# Allegro board RotariuMB.brd
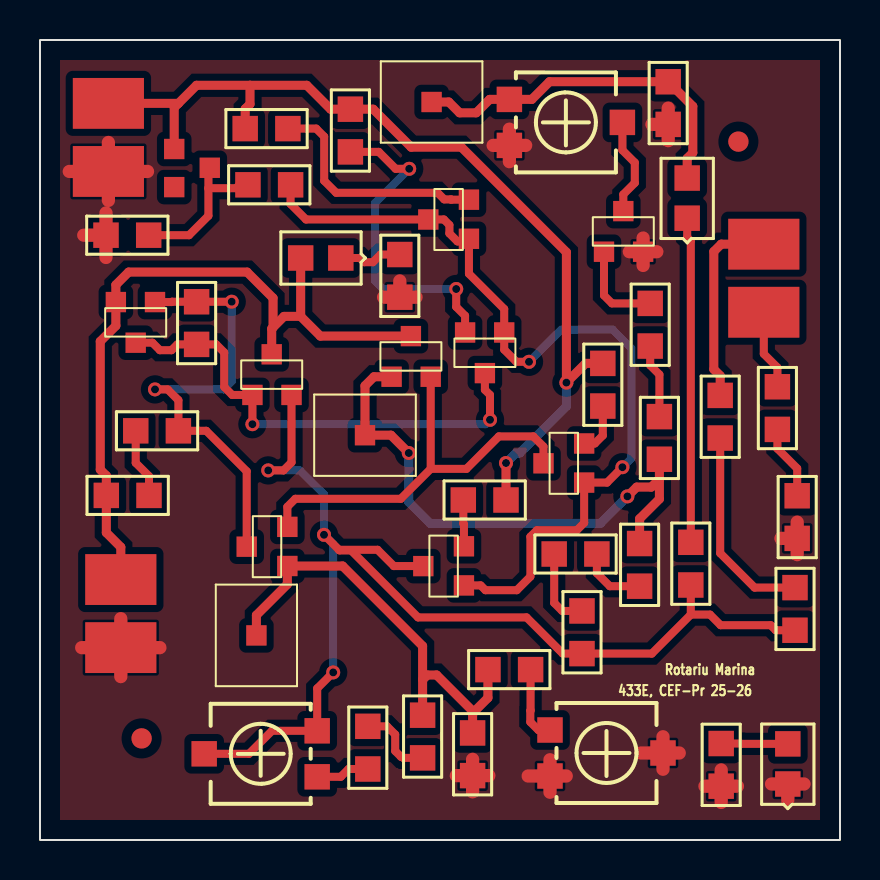
[diagram p0: board, top side]
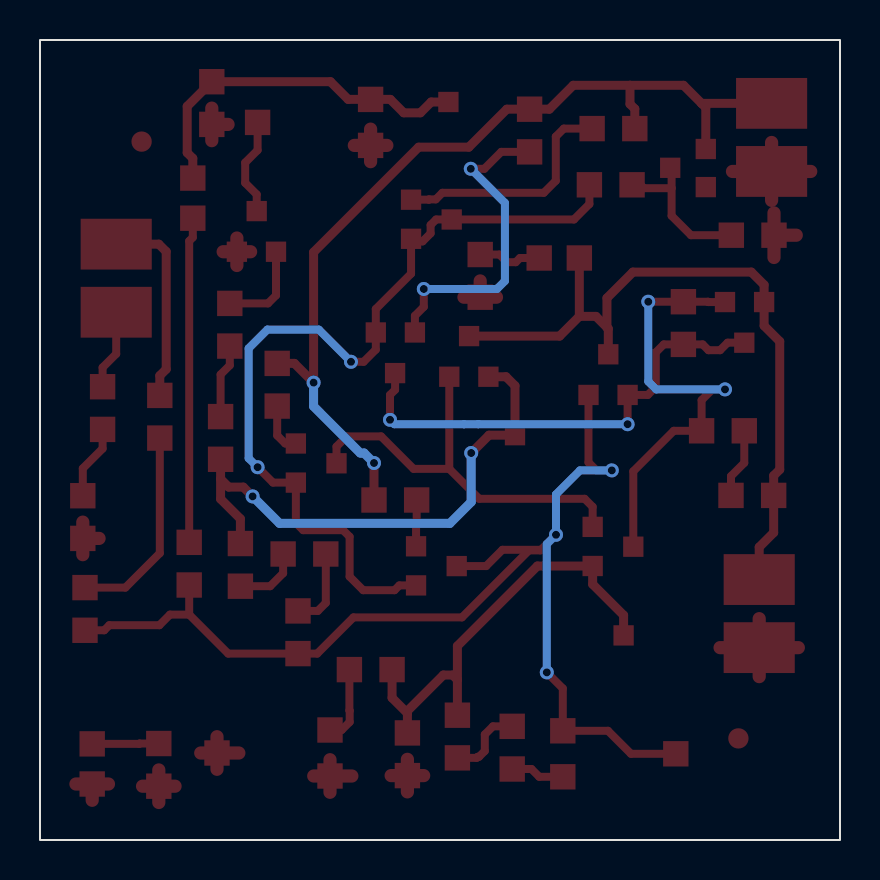
[diagram p1: board, bottom side, seen from below]

Outline 40 x 40 mm; copper layers: TOP, BOTTOM. Coordinates in mm from the lower left corner of the outline.
Outline path: rectangle 0,0 40,40

## Design rules (mm)
nets with their own width: min track width 0.4; nets N311744 N311796 N311844 N311952 N311958 N312148 N312154 N312204 N312252 N312298 N312310 N312450 N312534 N312554 N312656 N312740 N312860 N312866 N312872 N313104 N313292 N313298 N313314 N321792 N3130741
nets with their own width: min track width 0.45; nets V+ V- VCC VEE VGS VOUT
nets with their own width: min track width 0.66; nets 0

## Placement (name value [footprint] x y rotation side)
C1  4.7n  [SMC0805]  21.63 3.22 90 top
C2  4.7n  [SMC0805]  19.13 6.24 270 top
C3  100p  [SMC0805]  7.83 24.78 90 top
C4  33n  [SMC0805]  31.41 35.78 90 top
D1  BZX84-C2V7  [SOT23]  7.6 33.61 0 top
D3  D1N4148  [SMD0805]  32.36 31.09 90 top
D4  5V,LED,LED  [SMD0805]  15.04 29.1 180 top
D5  5V,LED,LED  [SMD0805]  37.39 2.8 90 top
JVCC  CON2  [JUMPER_SMD1X2]  4.04 11.32 270 top
JVEE  CON2  [JUMPER_SMD1X2]  3.42 35.13 90 top
JVGS  CON1  [JUMPER_SMD1X1]  19.58 36.9 0 top
JVOUT  CON2  [JUMPER_SMD1X2]  36.19 28.09 270 top
NOREF  -  [unnamed]  5.08 5.08 0 top
NOREF#2  -  [unnamed]  34.92 34.92 0 top
NOREF#3  -  [#2]  0 40 0 top
NOREF#4  -  [#2]  0 0 90 top
P1  5k  [TS53YL]  25.5 3.2 180 top
P2  5k  [TS53YL]  13.86 5.46 0 top
P3  500k  [TS53YL]  23.47 34.73 180 top
Q1  QBC817-25  [TO236]  12.24 13.7 0 top
Q2  QBC817-25  [TO236]  17.58 23.29 270 top
Q3  QBC817-25  [TO236]  27.08 17.87 0 top
Q4  QBC817-25  [TO236]  23.21 25.25 90 top
Q5  QBC817-25  [TO236]  21.32 30.06 0 top
Q6  QBC817-25  [TO236]  21.07 12.73 0 top
Q7  QBC807-25  [TO236]  5.75 26.77 90 top
Q8  QBC817-25  [TO236]  10.62 22.38 270 top
R1  330  [SMR0805]  24.53 8.52 180 top
R2  330  [SMR0805]  16.39 3.55 90 top
R3  330  [SMR0805]  5.45 17.23 180 top
R4  220  [SMR0805]  6.92 20.46 180 top
R5  1k  [SMR0805]  3.3 30.24 0 top
R6  1k  [SMR0805]  12.53 32.76 180 top
R7  100  [SMR0805]  10.26 35.57 0 top
R8  51  [SMR0805]  28.14 23.83 270 top
R9  51  [SMR0805]  15.52 36.54 270 top
R10  68  [SMR0805]  23.3 17 180 top
R11  3.3k  [SMR0805]  30.51 26.83 270 top
R13  6.8k  [SMR0805]  29.98 12.69 90 top
R14  3.9k  [SMR0805]  25.71 14.3 0 top
R15  910  [SMR0805]  27.1 9.32 90 top
R17  1k  [SMR0805]  32.54 12.75 90 top
R18  68k  [SMR0805]  37.75 12.62 270 top
R19  68k  [SMR0805]  34.01 22.23 270 top
R22  470  [SMR0805]  34.06 2.69 90 top
R23  470  [SMR0805]  17.99 27.14 90 top
R24  2.2k  [SMR0805]  30.97 21.17 270 top
RL1  10k  [SMR0805]  36.87 20.53 90 top
RL2  15k  [SMR0805]  37.86 15.08 90 top
T9  JMMBFJ309LT1  [TO236]  28.2 29.54 270 top
V+  CON1  [JUMPER_SMD1X1]  10.82 10.23 90 top
V-  CON1  [JUMPER_SMD1X1]  16.25 20.24 0 top

## Library data of the parts
C1-C4 = C
D1 = BZX84-C2V7_0
D3 = D1N4148_4
D4 = LED_8
D5 = LED_9
JVCC JVEE JVOUT = CON2
JVGS V+ V- = CON1
P1 = POT_0
P2 P3 = POT
Q1 = QBC817-25_0
Q2 = QBC817-25_1
Q3 = QBC817-25_2
Q4 = QBC817-25_3
Q5 = QBC817-25_4
Q6 = QBC817-25_5
Q7 = QBC807-25_0
Q8 = QBC817-25_6
R1-R11 R13-R15 R17-R19 R22-R24 RL1 RL2 = R
T9 = JMMBFJ309LT1_0

## Footprints (pads in the part's own frame, mm; a bottom-side part is the same pattern mirrored in y, then rotated)
JUMPER_SMD1X1
  rect 1.016x1.016 smd: 1(0,0)
JUMPER_SMD1X2
  rect 2.54x3.556 smd: 1(-1.702,0) 2(1.702,0)
SMC0805
  rect 1.27x1.27 smd: 1(0,0) 2(2.134,0)
SMD0805
  rect 1.27x1.27 smd: A(2.007,0) C(0,0)
SMR0805
  rect 1.27x1.27 smd: 1(0,0) 2(2.134,0)
SOT23
  rect 1.016x1.016 smd: 1(-0.889,0.94) 2(-0.889,-0.965) 3(0.889,0)
TO236
  rect 1.016x1.016 smd: 1(0.127,0) 2(0.127,1.956) 3(-1.905,0.965)
TS53YL
  rect 1.27x1.27 smd: 1(0,0) 2(-5.65,-1.15) 3(0,-2.3)
unnamed
  round 1.016 smd: (0,0)

## Nets
VCC: D4.A JVCC.1 Q2.3 Q7.2(E) Q8.3 R3.2
VEE: D1.1 JVEE.2 R7.1 R8.1 R9.1 R10.1
0: C1.1 C4.1 D5.C(2) JVCC.2 JVEE.1 P1.1 P1.2(T) P3.1 R5.1 R22.1 R23.1 RL2.1 T9.2(S)
V+: C1.2 C2.1 Q1.1 R1.2 V+.1
V-: Q2.1 R13.2 R24.2 V-.1
VGS: C4.2 D3.A JVGS.1 P3.3
VOUT: JVOUT.1 R19.1
N311744: R3.1 R4.2
N311796: C3.2 Q1.3 Q7.1 R4.1
N311844: C3.1 Q4.3 Q7.3 Q8.1
N311952: D4.C(2) R23.2
N311958: P2.1 P2.2(T) Q6.3 Q8.2(E) R15.1 R17.1 R18.2
N312148: R13.1 R14.2
N312154: R14.1 R15.2
N312204: Q1.2(E) Q2.2(E) Q3.3
N312252: D1.3 R5.2 R6.2
N312298: P1.3 R1.1
N312310: R11.2 R24.1
N312450: D3.C(2) R17.2
N312534: Q3.1 Q4.1 Q5.1 Q5.3 Q6.1 R6.1
N312554: R11.1 T9.1
N312656: R18.1 R19.2
N312740: P3.2(T) T9.3
N312860: Q5.2(E) R7.2
N312866: Q3.2(E) R8.2
N312872: Q4.2(E) R9.2
N313104: D5.A R22.2
N313292: C2.2 R2.2
N313298: P2.3 R2.1
N313314: RL1.1 RL2.2
N321792: JVOUT.2 RL1.2
N3130741: Q6.2(E) R10.2

Pads without a net: D1 2

## Via types
v1: diameter 0.7, hole 0.4, TOP to BOTTOM, 15 vias

## Routing (per net, layer and track width the routed paths; a pad name or vN(x,y) marks a point on that pad's centre or on a via; arc(x,y) is an arc through that point)
VCC: length 37.4
  TOP w0.45: Q2.3 14.02,25.2 13.03,26.18 ; JVCC.1 4.04,14.64 3.32,15.37 R3.2 3.32,18.22 3.01,18.52 3.01,24.93 3.79,25.71 Q7.2 3.79,27.76 4.43,28.4 10.35,28.4 11.65,27.1 11.65,25.63 ; 13.03,26.18 D4.A ; 13.03,26.18 12.2,26.18 11.65,25.63 ; 11.65,25.63 11.59,25.56 Q8.3
VEE: length 47.3
  TOP w0.45: R10.1 v1(23.3,18.85) ; R7.1 10.26,36.56 10.5,36.8 10.5,37.74 ; JVEE.2 6.92,36.83 ; 6.92,36.83 6.71,36.62 6.71,34.55 ; 6.92,36.83 7.83,37.74 10.5,37.74 ; R8.1 27.28,23.83 v1(26.32,22.87) 26.32,29.39 21.07,34.64 18.56,34.64 16.66,36.54 R9.1 14.53,36.54 13.34,37.74 10.5,37.74
  BOTTOM w0.45: v1(26.32,22.87) 26.32,21.68 23.98,19.35 23.8,19.35 v1(23.3,18.85)
0: length 46.3
  TOP w0.66: 22.66,34.73 P3.1 ; P3.1 24.28,34.73 ; P3.1 23.47,35.54 ; P3.1 23.47,33.92 ; 30.16,28.73 T9.2 ; T9.2 30.16,30.1 ; T9.2 29.47,29.41 ; T9.2 30.84,29.41 ; 37.86,14.27 RL2.1 ; RL2.1 37.86,15.89 ; RL2.1 37.05,15.08 ; JVEE.1 3.42,34.88 ; JVEE.1 3.42,31.98 ; JVEE.1 5.38,33.43 ; JVEE.1 1.46,33.43 ; 34.06,1.88 R22.1 ; R22.1 33.25,2.69 ; R22.1 34.06,3.5 ; R22.1 34.87,2.69 ; 37.39,1.99 D5.C ; D5.C 38.2,2.8 ; D5.C 36.58,2.8 ; P1.2 30.06,4.35 ; P1.2 31.15,5.16 ; P1.2 31.15,3.54 ; P1.2 31.96,4.35 ; R23.1 18.8,27.14 ; R23.1 17.18,27.14 ; R23.1 17.99,27.95 ; 30.6,35.78 C4.1 ; C4.1 31.41,34.97 ; C4.1 31.41,36.59 ; P1.1 26.31,3.2 ; P1.1 24.41,3.2 ; P1.1 25.5,4.01 ; P1.1 25.5,2.39 ; 4.04,8.17 JVCC.2 ; JVCC.2 6,9.62 ; JVCC.2 2.08,9.62 ; JVCC.2 4.04,11.07 ; 20.82,3.22 C1.1 ; C1.1 21.63,2.41 ; C1.1 21.63,4.03 ; C1.1 22.44,3.22 ; R5.1 3.3,31.35 ; R5.1 3.3,29.13 ; R5.1 2.19,30.24
V+: length 22.9
  TOP w0.45: R1.2 22.4,7.11 21.63,6.34 ; V+.1 10.82,11.24 12.37,12.79 Q1.1 15.13,13.7 19.13,9.7 19.13,8.01 ; 19.13,8.01 19.37,8.25 19.83,8.25 21.63,6.45 21.63,6.34 ; 19.13,8.01 C2.1 ; 21.63,6.34 C1.2
V-: length 27.5
  TOP w0.45: 30.97,18.05 30.97,17.05 29.98,16.06 R13.2 ; 30.97,18.05 R24.2 ; 30.97,18.05 30.57,17.64 29.83,17.64 v1(29.37,17.18) ; v1(18.44,19.35) 17.55,20.24 V-.1 16.25,22.71 16.7,23.16 Q2.1
  BOTTOM w0.45: v1(18.44,19.35) 18.44,16.9 19.51,15.83 28.02,15.83 v1(29.37,17.18)
VGS: length 18.1
  TOP w0.45: D3.A 32.36,34.08 32.64,34.36 32.64,36.68 C4.2 25.47,37.91 24.59,37.03 P3.3 22.48,37.03 21.81,36.36 20.98,36.36 20.44,36.9 JVGS.1
VOUT: length 10
  TOP w0.45: JVOUT.1 34.06,29.79 33.69,29.42 33.69,23.54 34.01,23.22 R19.1
N311744: length 3.5
  TOP w0.4: R3.1 5.45,18.19 4.79,18.86 R4.2
N311796: length 22.8
  TOP w0.4: Q1.3 10.34,18.43 8.31,20.46 R4.1 6.92,21.99 6.38,22.53 v1(5.75,22.53) ; v1(9.59,26.91) C3.2 6.6,26.91 6.58,26.9 Q7.1
  BOTTOM w0.4: v1(9.59,26.91) 9.59,22.93 9.19,22.53 v1(5.75,22.53)
N311844: length 24
  TOP w0.4: Q7.3 5.62,24.86 5.99,24.49 6.58,24.49 6.87,24.78 C3.1 8.81,24.78 9.21,24.38 9.21,22.65 9.61,22.25 Q8.1 v1(10.62,20.79) ; v1(22.5,21.01) 22.5,22.25 22.24,22.51 Q4.3
  BOTTOM w0.4: v1(22.5,21.01) 22.28,20.79 18.8,20.79 v1(10.62,20.79)
N311952: length 3.2
  TOP w0.4: D4.C 16,29.1 16.21,28.89 16.64,28.89 17.03,29.27 R23.2
N311958: length 59.6
  TOP w0.4: Q8.2 12.58,18.88 12.18,18.48 v1(11.41,18.48) ; 32.54,11.27 30.59,9.32 R15.1 26.14,9.32 24.33,11.13 18.9,11.13 15.55,14.48 14.98,14.48 14.95,14.51 ; 32.54,11.27 R17.1 ; 32.54,11.27 33.5,11.27 34.03,10.74 36.53,10.74 36.79,10.49 R18.2 ; 14.95,14.51 v1(14.2,15.26) ; 14.95,14.51 16.88,14.51 17.69,13.7 Q6.3 ; P2.2 10.45,4.31 11.6,5.46 P2.1 13.86,7.58 v1(14.66,8.38)
  BOTTOM w0.4: v1(11.41,18.48) 13,18.48 14.2,17.28 v1(14.2,15.26) 14.66,14.8 v1(14.66,8.38)
N312148: length 3.4
  TOP w0.4: R14.2 27.84,13.34 28.49,12.69 R13.1
N312154: length 4
  TOP w0.4: R14.1 25.71,11.85 26.11,11.45 R15.2
N312204: length 20.9
  TOP w0.4: 25.18,18.84 25.18,19.67 24.66,20.18 22.94,20.18 21.32,18.56 19.54,18.56 ; 19.54,18.56 Q2.2 ; 19.54,18.56 18.04,17.06 12.77,17.06 12.37,16.66 Q1.2
N312252: length 7.9
  TOP w0.4: R5.2 7.45,30.24 8.42,31.21 8.42,32.59 ; D1.3 8.42,33.54 8.42,32.59 ; 8.42,32.59 9.81,32.59 9.98,32.76 R6.2
N312298: length 3.8
  TOP w0.4: P1.3 24.92,5.5 24.52,5.9 24.52,6.47 24.53,6.48 R1.1
N312310: length 3.7
  TOP w0.4: R11.2 30.51,23.73 30.97,23.27 R24.1
N312450: length 16.3
  TOP w0.4: R17.2 32.54,29.95 32.36,30.13 D3.C
N312534: length 43.9
  TOP w0.4: R6.1 12.53,31.8 13.3,31.03 Q5.3 20.19,31.03 20.47,30.75 20.47,30.33 20.87,29.93 21.32,29.93 Q5.1 21.45,28.31 23.21,26.55 Q4.1 23.21,24.52 23.82,23.91 v1(24.45,23.91) ; v1(29.12,18.64) 28.35,17.87 27.21,17.87 27.21,15.86 26.84,15.49 24.84,15.49 24.52,15.17 24.52,13.17 23.84,12.49 22.27,12.49 22.03,12.73 Q6.1
  BOTTOM w0.4: v1(29.12,18.64) 29.57,19.09 29.57,24.58 28.63,25.52 26.06,25.52 v1(24.45,23.91)
N312554: length 4.7
  TOP w0.4: T9.1 28.2,27.23 28.6,26.83 R11.1
N312656: length 10.2
  TOP w0.4: R19.2 34.01,14.34 35.73,12.62 R18.1
N312740: length 4.9
  TOP w0.4: T9.3 29.17,32.28 29.74,32.85 29.74,33.87 29.12,34.49 P3.2
N312860: length 11.8
  TOP w0.4: Q5.2 20.56,32.02 20.54,32.03 20.21,32.03 19.88,32.36 14.81,32.36 14.21,32.96 14.21,35.17 13.81,35.57 R7.2
N312866: length 2.6
  TOP w0.4: R8.2 28.14,20.23 27.74,19.83 27.21,19.83
N312872: length 16.2
  TOP w0.4: Q4.2 21.25,26.21 20.81,26.66 v1(20.81,27.55) ; v1(18.46,33.56) 17.78,33.56 16.94,34.41 R9.2
  BOTTOM w0.4: v1(20.81,27.55) 17.16,27.55 16.75,27.95 16.75,31.86 v1(18.46,33.56)
N313104: length 3.3
  TOP w0.4: R22.2 35.02,4.82 35.04,4.81 D5.A
N313292: length 3.9
  TOP w0.4: R2.2 17.35,5.68 17.76,5.28 17.76,4.45 18.05,4.16 18.11,4.16 18.17,4.11 C2.2
N313298: length 2.7
  TOP w0.4: P2.3 15.04,3.16 15.43,3.55 R2.1
N313314: length 3.7
  TOP w0.4: RL2.2 37.86,18.58 36.87,19.57 RL1.1
N321792: length 4
  TOP w0.4: RL1.2 36.87,23.63 36.19,24.31 JVOUT.2
N3130741: length 2.3
  TOP w0.4: Q6.2 21.2,15.79 21.17,15.82 R10.2

## Copper pours and planes (outline as drawn; the poured copper is in the pictures)
0 on TOP: 1,1 1,39 39,39 39,1

## Text on the board
Ref Des/Silkscreen Top: 433E, CEF-Pr 25-26 | Rotariu Marina
XSECTION_CHART: *  SURFACE - AIR 0 MIL | L1 TOP CONDUCTOR - COPPER 1.2 MIL | *  DIELECTRIC - FR-4 8 MIL | L2 BOTTOM CONDUCTOR - COPPER 1.2 MIL | DESIGN CROSS SECTION CHART | ___________________________ | TOTAL THICKNESS 10.4 MIL | 1-2
PLACE_BOUND_TOP: FIGURE | FINISHED_SIZE | 0.4 | DRILL CHART: TOP to BOTTOM | ALL UNITS ARE IN MILLIMETERS | PLATED | QTY | 15
